# Altium PCB FlightController_Top_5x5.PcbDoc (part 3 of 4)
Units mm, origin at the board's own origin, x right, y up, seen from the top; angles counter-clockwise.
Board outline 127 x 127 mm, 2 copper layers (Top Layer, Bottom Layer), stack 0.691 mm thick; 156 components, 161 nets, 860 pads, 483 vias.
Unrouted connection lines stored in the file: 9.
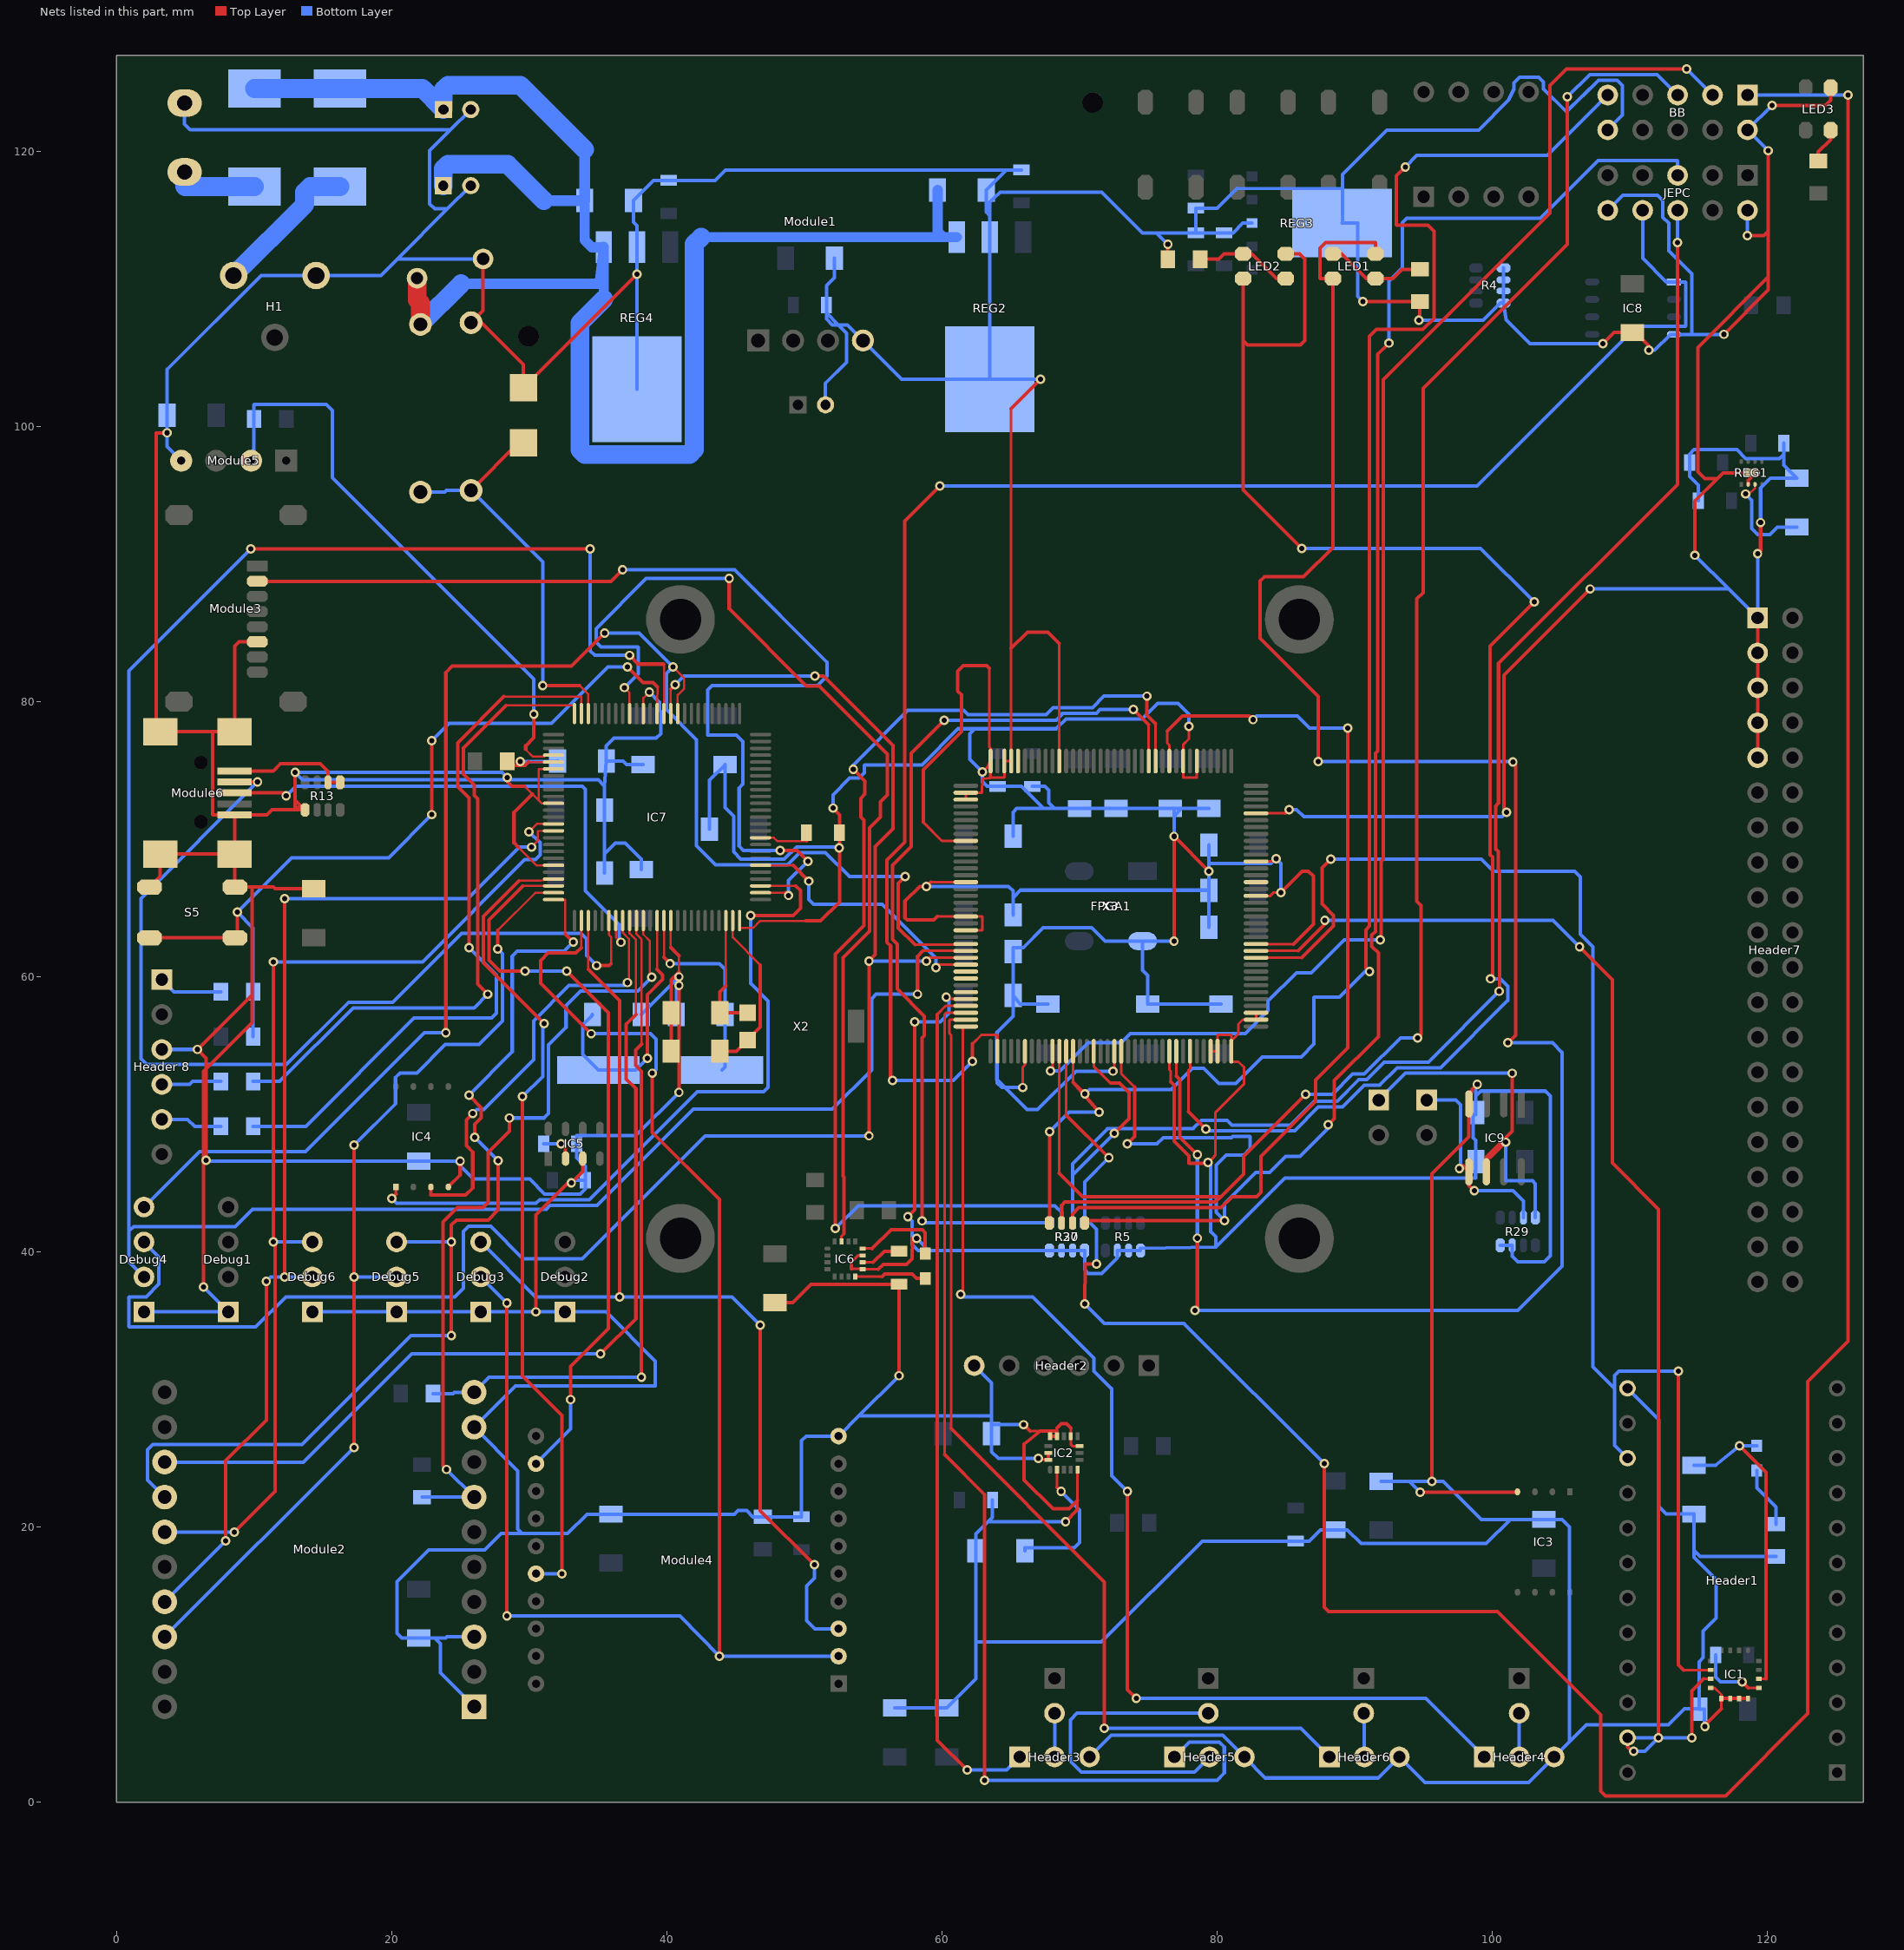
[diagram p3: the nets of this part, all layers, seen from the top]

## Via types
v1: diameter 0.686, hole 0.381, Top Layer to Bottom Layer, 483 vias

## Nets (pads, with @x,y where several pads share a name; then routed paths per layer and width w, separated by ;. In a path a pad name is that pad's centre, name@x,y a point inside that pad or via, vN(x,y) a via of type N, cw(c..) or ccw(c..) an arc to the next point about the centre after c; other vN are vias at no path point) (continued)
GND: "Header 8.3" BB.2 BB.10 C2.1 C3.2 C4.2 C5.1 C7.2 C8.2 C9.1 C10.2 C11.2 C12.2 C13.2 C14.2 C15.1 C16.2 C17.2 C18.2 C19.1 C20.2 C21.2 C23.1 C24.2 C25.2 C26.2 C27.2 C28.2 C29.2 C30.2 C31.2 C32.1 C33.1 C34.1 C35.1 C36.2 C37.2 C38.1 C39.2 C40.1 C41.2 C42.2 C43.2 C44.2 C45.2 C46.2 C47.2 C48.2 C49.1 C56.2 C57.2 C58.2 C59.2 C60.2 C61.2 C62.2 C63.2 C64.2 C65.2 C66.2 C67.2 C68.2 C69.2 C70.2 C71.2 C72.2 C73.2 C74.2 C75.2 C76.2 C77.2 C78.1 C79.1 D2.A Debug1.1 Debug2.1 Debug3.1 Debug4.1 Debug5.1 Debug6.1 FPGA1.6 FPGA1.19 FPGA1.27 FPGA1.33 FPGA1.34 FPGA1.36 FPGA1.38 FPGA1.39 FPGA1.49 FPGA1.56 FPGA1.61 FPGA1.68 FPGA1.78 FPGA1.80 FPGA1.98 FPGA1.105 FPGA1.106 FPGA1.108 FPGA1.110 FPGA1.111 FPGA1.117 FPGA1.123 FPGA1.128 FPGA1.130 FPGA1.140 H1.OUT Header1.13 Header2.6 Header3.3 Header4.3 Header5.3 Header6.3 Header7.1 Header7.3 Header7.5 Header7.7 Header7.9 Header9.R IC1.8 IC1.9 IC1.10 IC1.11 IC1.12 IC2.5 IC2.8 IC2.10 IC2.12 IC2.13 IC2.15 IC2.16 IC3.4 IC4.4 IC5.3 IC6.9 IC6.11 IC7.15 IC7.31 IC7.36 IC7.45 IC7.65 IC7.75 IC8.4 IC9.4 JEPC.2 JEPC.10 LED3.1 Module1.4 Module2.1 Module2.3 Module2.9 Module3.6 Module4.10 Module5.4 Module6.1 R3.2 R4.5 R4.6 R4.7 R4.8 R5.5 R5.6 R5.7 R6.2 R7.2 R13.5 R20.1 R29.3 R29.4 R30.5 R30.6 R30.7 R30.8 REG1.2 REG2.2 REG3.3 REG4.2 S5.1 X3.2 | length 1607.2
  Top Layer w0.158: 29.19,69.464 30.526,68.128 IC7.45@31.778,68.128 ; 29.677,73.859 30.228,73.307 30.704,72.831 ; IC7.36@31.778,72.628 30.907,72.628 30.704,72.831 ; IC7.31@31.778,75.128 30.729,75.128 30.704,75.103 30.704,72.831 ; IC7.15@38.303,79.153 38.303,80.276 v1(38.743,80.717) ; 40.303,62.137 40.303,62.232 ; IC7.65@40.303,64.103 40.303,62.232 ; 40.889,60.358 40.889,61.55 40.889,61.646 40.303,62.232 ; IC7.75@45.303,64.103 45.303,63.567 46.287,63.567 46.799,64.08 50.11,64.08
  Top Layer w0.189: 53.437,39.277 53.92,39.759 IC6.11@54.239,39.759 ; 53.462,38.781 54.174,38.781 54.174,38.759 IC6.9@54.239,38.759 55.393,38.759 ; 58.673,71.238 60.011,69.901 FPGA1.117@61.748,69.901 ; 59.192,66.901 FPGA1.123@61.748,66.901 ; 59.67,64.401 FPGA1.128@61.748,64.401 62.937,64.401 62.962,64.376 62.962,63.426 62.937,63.401 FPGA1.130@61.748,63.401 ; v1(60.32,58.542) 60.462,58.401 FPGA1.140@61.748,58.401 ; FPGA1.111@61.748,72.901 61.743,72.901 61.743,73.401 FPGA1.110@61.748,73.401 62.937,73.401 62.962,74.392 63.523,74.468 FPGA1.108@63.538,75.23 ; v1(62.962,74.913) 63.28,75.23 ; 63.445,82.457 63.445,76.729 63.548,76.625 FPGA1.108@63.548,75.701 ; FPGA1.106@64.548,75.701 FPGA1.106@64.548,75.687 ; 65.048,101.324 65.048,83.898 FPGA1.105@65.048,75.701 65.048,75.687 FPGA1.106@64.548,75.687 ; v1(65.888,51.964) 65.888,53.437 66.048,53.596 FPGA1.6@66.048,54.601 ; 66.416,26.996 67.161,26.986 67.88,26.977 68.375,26.97 ; v1@67.14,24.9 IC2.16@67.741,24.9 ; IC2.12@68.375,26.616 68.375,26.97 ; 68.375,27.212 68.375,26.996 68.375,26.97 ; FPGA1.98@68.548,75.701 68.548,84.248 ; 69.375,27.212 IC2.10@69.375,26.616 69.375,26.03 69.506,25.9 IC2.8@70.009,25.9 ; 69.875,21.285 69.875,21.957 IC2.5@69.875,24.184 ; v1(72.436,53.158) 72.548,53.269 FPGA1.19@72.548,54.601 ; FPGA1.27@76.548,54.601 76.548,53.234 76.653,53.129 76.653,52.396 ; v1(77.973,78.227) 77.973,77.313 77.548,76.888 FPGA1.80@77.548,75.701 77.548,74.519 77.573,74.494 78.523,74.494 78.548,74.519 FPGA1.78@78.548,75.701 ; v1@79.358,46.452 79.391,46.489 79.393,46.491 79.904,47.068 79.904,50.162 81.987,52.245 81.987,53.424 81.568,53.843 81.048,53.843 FPGA1.36@81.048,54.601 FPGA1.36@81.048,55.36 ; FPGA1.33@79.548,54.601 79.548,54.605 FPGA1.34@80.048,54.605 ; FPGA1.34@80.048,54.601 FPGA1.34@80.048,54.605 ; FPGA1.39@82.848,57.401 FPGA1.38@82.848,56.901 81.885,56.901 81.563,56.579 81.563,55.875 FPGA1.36@81.048,55.36 ; FPGA1.49@82.848,62.401 85.566,62.401 ; FPGA1.56@82.848,65.901 83.884,65.901 84.133,66.15 v1(84.654,66.15) ; FPGA1.61@82.848,68.401 84.098,68.401 v1(84.298,68.601) ; FPGA1.68@82.848,71.901 84.985,71.901 ; IC1.8@115.893,8.324 116.188,8.324 116.668,7.844 IC1.9@116.668,7.549 116.668,6.8 ; 63.28,75.23 FPGA1.108@63.538,75.23 ; 63.28,75.23 FPGA1.108@63.548,75.701 ; FPGA1.108@63.538,75.23 FPGA1.108@63.548,75.23 ; FPGA1.108@63.538,75.23 FPGA1.108@63.548,75.701 ; FPGA1.108@63.548,75.23 FPGA1.108@63.548,75.701 ; FPGA1.108@63.548,75.23 63.548,74.519 63.573,74.494 64.523,74.494 64.548,74.519 FPGA1.106@64.548,75.687 ; FPGA1.34@80.048,54.605 80.048,55.774 80.073,55.799 81.023,55.799 81.048,55.774 FPGA1.36@81.048,55.36
  Top Layer w0.252: IC4.4@24.13,44.737 24.13,44.75 24.989,45.609 ; v1(94.793,22.551) 101.854,22.551 IC3.4@101.854,22.573
  Top Layer w0.254: S5.1@2.413,66.548 3.189,67.324 Module6.1@3.189,68.935 Module6.1@8.589,68.935 ; Module6.1@3.189,77.835 Module6.1@3.385,77.835 ; v1(3.686,99.563) 3.661,99.538 2.891,99.538 2.891,78.329 Module6.1@3.385,77.835 ; v1(6.32,37.46) 6.32,53.132 6.523,53.335 ; v1(6.523,46.681) 6.523,53.335 ; Module3.6@10.239,84.369 8.914,84.369 8.589,84.044 Module6.1@8.589,77.835 7.031,77.835 ; v1(13,74.875) 13,72.863 ; C15.1@14.351,66.418 11.53,66.418 11.4,66.548 9.825,66.548 ; 24.989,45.609 v1(24.989,46.604) ; C38.1@26.657,112.206 26.657,108.449 R20.1@25.781,107.573 26.56,107.573 29.591,104.542 D2.A@29.591,102.838 v1(37.846,111.093) ; v1(28.418,74.494) 28.418,74.202 28.761,73.859 29.677,73.859 ; 29.19,69.464 28.901,69.754 28.901,71.979 30.228,73.307 ; v1(30.501,35.657) 30.501,42.706 v1@32.825,45.03 ; v1(33.066,45.03) 33.899,45.862 IC5.3@33.899,46.804 ; 40.303,62.137 40.889,61.55 ; C35.1@40.322,54.61 C34.1@40.322,57.404 40.322,59.79 40.889,60.358 v1(40.889,60.009) v1(40.889,59.392) 40.889,57.404 v1(40.889,51.614) ; C21.2@47.879,36.325 49.17,36.325 50.507,37.662 C20.2@56.891,37.662 ; 50.11,64.08 51.196,64.08 52.568,65.452 v1@52.568,69.408 ; v1(52.091,72.278) 52.568,71.801 C30.2@52.568,70.485 v1@52.568,69.408 ; v1(52.548,69.388) v1@52.568,69.408 ; 53.437,39.277 53.437,38.807 53.462,38.781 ; 55.393,38.759 55.745,39.111 57.438,39.111 57.857,39.531 57.882,40.991 v1(58.174,40.991) ; v1(56.891,31.015) C20.2@56.891,37.662 ; C20.2@56.896,37.662 C20.2@56.891,37.662 ; v1(57.539,42.579) 58.034,43.074 v1(58.034,56.739) ; 58.673,71.238 58.673,75.082 61.425,77.834 61.425,80.526 61.159,80.793 61.159,82.241 61.565,82.647 63.254,82.647 63.445,82.457 ; v1(58.885,66.594) 58.401,66.594 57.322,65.515 57.322,64.321 57.501,64.141 59.41,64.141 59.67,64.401 ; v1(58.885,66.594) 59.192,66.901 ; 65.048,83.898 66.224,85.074 67.722,85.074 68.548,84.248 ; 65.048,101.324 v1(67.178,103.454) ; v1(65.959,27.453) 66.416,26.996 ; v1(67.026,25.014) v1@67.14,24.9 ; IC2.16@67.741,24.9 IC2.15@67.741,25.4 ; IC2.13@67.875,26.616 IC2.12@68.375,26.616 ; 68.375,26.996 67.173,26.996 67.161,26.986 65.994,26.042 65.994,23.441 68.093,21.342 69.261,21.342 69.875,21.957 ; 68.375,27.212 68.693,27.529 69.058,27.529 69.375,27.212 ; v1(68.997,20.407) 69.875,21.285 ; R7.2@76.437,112.184 v1(76.437,113.266) ; 76.653,52.396 76.906,52.142 76.906,48.052 77.959,46.999 77.959,46.477 77.984,46.452 v1@79.358,46.452 ; v1(76.881,62.611) v1(76.881,70.226) v1(79.413,67.695) ; v1(79.358,46.522) v1@79.391,46.489 ; v1(84.654,66.15) 86.201,67.697 86.648,67.697 87.017,67.327 87.017,63.853 85.566,62.401 ; 84.985,71.901 v1(85.252,72.168) ; v1(90.607,109.104) R6.2@94.757,109.104 94.757,108.13 94.687,108.06 v1(94.687,107.742) ; v1(95.626,23.342) 95.626,45.69 98.321,48.384 IC9.4@98.321,50.775 98.573,51.837 v1(98.928,52.192) ; v1(101.062,71.966) 100.883,72.146 100.883,81.96 v1(107.133,88.21) ; v1(108.06,106.04) 108.873,106.853 C64.2@110.193,106.853 110.435,106.853 111.4,105.888 v1(111.4,105.571) ; v1(114.753,90.664) 114.753,94.61 116.378,96.236 ; v1(115.489,5.507) 115.489,5.622 116.668,6.8 ; IC1.9@116.668,7.549 IC1.10@117.318,7.549 IC1.11@117.968,7.549 IC1.12@118.618,7.549 ; v1(116.861,106.723) 120.087,109.948 120.087,110.892 ; v1(118.575,113.889) 119.769,113.889 120.087,114.207 ; REG1.2@118.622,95.822 118.622,96.109 118.872,96.359 REG1.2@118.872,96.647 116.789,96.647 116.378,96.236 ; Header7.9@119.311,75.946 Header7.7@119.311,78.486 Header7.5@119.311,81.026 Header7.3@119.311,83.566 Header7.1@119.311,86.106 ; v1(119.311,90.787) 119.528,91.004 v1(119.528,93.036) ; v1(120.087,120.07) 120.087,114.207 ; v1(120.357,123.363) 124.245,123.363 124.613,123.732 LED3.1@124.613,124.656 ; Module6.1@3.385,77.835 5.888,77.835 7.031,77.835 ; 6.523,53.335 9.851,56.663 9.851,58.699 ; 6.523,53.335 6.523,54.102 v1(5.888,54.737) 9.851,58.699 ; 7.031,77.835 7.006,77.81 7.006,71.81 7.031,71.785 Module6.1@8.589,71.785 ; Module6.1@8.589,68.935 Module6.1@8.589,71.785 ; Module6.1@8.589,68.935 8.589,67.736 8.613,67.712 S5.1@8.613,66.548 9.825,66.548 ; Module6.1@8.589,71.785 10.943,71.785 11.31,72.152 R13.5@13.711,72.152 ; 9.825,66.548 9.851,66.523 9.851,58.699 ; 13,72.863 13,72.36 13.026,72.335 R13.5@13.528,72.335 ; 13,72.863 R13.5@13.528,72.335 ; R13.5@13.528,72.335 13.711,72.335 R13.5@13.711,72.152 ; R13.5@13.528,72.335 R13.5@13.711,72.152 ; 116.378,96.236 115.464,96.236 114.956,96.744 114.956,105.761 120.087,110.892 ; 120.087,110.892 120.087,114.207
  Bottom Layer w0.254: Debug4.1@2.002,35.657 Debug1.1@8.123,35.657 v1(6.32,37.46) ; 3.302,54.737 v1(5.888,54.737) ; Module5.4@4.709,97.536 3.686,98.559 v1(3.686,99.563) C17.2@3.686,100.838 3.686,104.168 10.516,110.998 H1.OUT@14.516,110.998 19.223,110.998 20.431,112.206 ; Header9.R@4.953,123.531 4.953,122 5.368,121.585 24.287,121.585 ; v1(6.523,46.681) 6.592,46.612 C13.2@21.971,46.612 v1@24.652,46.612 ; Debug6.1@14.245,35.657 Debug5.1@20.366,35.657 Debug3.1@26.488,35.657 29.536,35.657 v1(30.501,35.657) Debug2.1@32.609,35.657 35.606,35.657 39.183,32.08 39.183,30.298 39.157,30.272 29.002,30.272 Module2.9@26.005,27.275 29.18,24.1 29.18,19.871 29.498,19.553 ; v1(24.989,46.604) 24.981,46.612 v1@24.652,46.612 ; C36.2@25.758,117.533 24.07,115.845 ; C37.2@25.765,123.063 24.287,121.585 ; Module2.1@26.005,6.955 23.541,9.419 23.541,11.547 23.148,11.941 ; Module2.3@26.005,12.035 24.016,12.035 23.922,11.941 23.148,11.941 ; C38.1@26.657,112.206 20.431,112.206 ; v1(28.418,74.494) 28.037,74.875 v1(13,74.875) 13.523,74.352 35.022,74.352 35.49,73.884 ; v1@32.825,45.03 33.028,45.117 v1@33.249,45.212 ; v1(33.066,45.03) v1@33.249,45.212 ; C25.2@35.49,67.564 35.49,68.958 ; REG4.2@37.846,102.738 v1(37.846,111.093) REG4.2@37.846,113.076 37.846,114.626 37.589,114.883 C49.1@37.589,116.459 39.043,117.913 C47.2@40.132,117.913 43.516,117.913 44.278,118.675 64.697,118.675 ; C32.1@38.157,57.277 v1(40.889,60.009) ; C27.2@38.16,67.815 38.16,68.568 37.005,69.723 36.255,69.723 35.49,68.958 ; C28.2@38.287,75.441 37.076,75.441 36.825,75.692 C31.2@35.617,75.692 ; v1(38.743,80.717) 39.467,79.993 39.467,79.396 39.569,79.294 39.569,77.694 39.238,77.364 36.165,77.364 35.617,76.816 C31.2@35.617,75.692 ; C33.1@40.703,57.277 40.703,59.205 v1(40.889,59.392) ; v1(40.889,51.614) 37.759,48.484 33.458,48.484 C16.2@33.458,47.879 33.458,46.858 34.093,46.223 C14.2@34.093,45.212 ; C29.2@43.116,70.739 43.116,74.301 C26.2@44.242,75.427 ; C10.2@51.546,101.6 51.546,103.159 53.081,104.694 53.081,106.813 52.483,107.412 ; v1(52.091,72.278) 52.091,73.249 53.31,74.468 54.007,74.468 54.375,74.837 54.375,75.383 54.401,75.408 58.557,75.408 61.198,78.05 62.403,78.05 ; C9.1@52.194,112.268 52.194,110.832 51.619,110.257 C11.2@51.619,108.839 C11.2@51.619,108.276 ; v1(52.548,69.388) 52.472,69.464 49.443,69.464 48.548,68.569 45.394,68.569 44.864,69.1 44.864,71.687 44.242,72.309 C26.2@44.242,75.427 ; C67.2@56.569,6.86 C68.2@60.38,6.86 62.487,8.967 62.487,11.654 ; v1(56.891,31.015) 53.964,28.088 ; v1(57.539,42.579) 57.857,42.261 57.857,40.547 58.276,40.127 59.038,40.127 ; v1(58.034,56.739) 59.889,56.739 60.524,57.374 60.524,58.339 v1(60.32,58.542) ; v1(58.174,40.991) 59.038,40.127 ; v1(58.885,66.594) 64.853,66.594 65.183,66.264 65.183,65.756 ; Header2.6@62.357,31.75 63.624,30.483 63.624,28.062 ; C3.2@63.684,21.971 63.684,20.725 63.366,20.407 ; C75.2@65.183,64.516 65.183,65.756 ; C63.2@65.183,70.231 65.183,71.979 65.453,72.249 67.389,72.249 ; C41.2@65.786,118.675 64.697,118.675 ; v1(65.888,51.964) 64.599,51.964 ; v1(65.959,27.453) C4.2@63.624,27.453 ; C69.2@66.583,73.857 67.483,73.857 67.769,73.571 67.769,72.66 68.18,72.249 ; v1(67.026,25.014) 64.105,25.014 63.624,25.495 C4.2@63.624,26.797 C4.2@63.624,27.453 ; v1(67.178,103.454) REG2.2@63.5,103.454 ; C58.2@67.726,58.036 65.693,58.036 C71.2@65.183,58.674 ; v1(68.997,20.407) 63.366,20.407 ; Header3.3@70.739,3.302 72.309,4.872 80.429,4.872 Header5.3@82,3.302 83.528,1.773 91.732,1.773 Header6.3@93.26,3.302 95.119,1.443 102.662,1.443 Header4.3@104.521,3.302 105.637,4.418 ; v1(72.436,53.158) 69.756,53.158 66.973,50.375 66.188,50.375 64.599,51.964 ; v1(76.437,113.266) 75.6,114.103 ; v1(76.881,62.611) X3.2@74.598,62.611 ; v1(76.881,70.226) C76.2@76.881,71.707 ; v1(77.973,78.227) 77.973,79.118 77.186,79.905 75.689,79.905 74.554,78.77 69.049,78.77 68.328,78.05 62.403,78.05 ; v1(79.358,46.522) 79.558,46.322 79.558,41.49 79.928,41.12 79.928,40.354 ; C61.2@79.41,72.266 77.999,72.266 ; 79.413,68.271 79.413,68.321 C62.2@79.413,69.596 ; C59.2@79.413,63.627 C60.2@79.413,66.294 C60.2@79.413,66.315 ; 79.413,68.321 79.413,68.271 ; C74.2@80.299,58.036 C70.2@74.965,58.036 74.965,60.117 74.598,60.484 X3.2@74.598,62.611 ; REG3.3@82.55,114.808 81.879,114.808 81.174,114.103 C45.2@80.518,114.103 C48.2@78.486,114.103 ; v1(84.654,66.15) 84.654,68.245 v1(84.298,68.601) 83.942,68.245 79.438,68.245 79.413,68.271 ; v1(85.252,72.168) 85.803,72.168 86.322,71.649 100.745,71.649 v1(101.062,71.966) ; REG3.3@89.105,114.808 REG3.3@89.124,114.808 ; v1(90.607,109.104) 90.242,109.469 90.242,114.808 REG3.3@89.124,114.808 ; C72.2@91.948,23.342 94.001,23.342 ; v1(94.687,107.742) 99.343,107.742 100.605,109.004 R4.8@100.837,109.004 ; v1(94.793,22.551) 94.001,23.342 ; v1(98.928,52.192) 98.832,52.096 98.832,51.342 ; R29.4@100.602,40.504 R29.3@101.477,40.504 101.477,39.7 101.888,39.289 103.793,39.289 104.237,39.734 104.237,51.342 103.869,51.71 99.2,51.71 98.832,51.342 ; R4.5@100.837,111.554 R4.6@100.837,110.679 R4.7@100.837,109.879 R4.8@100.837,109.004 ; v1(107.133,88.21) 117.207,88.21 ; v1(108.06,106.04) 102.764,106.04 101.037,107.768 R4.8@100.837,109.004 ; JEPC.10@108.415,115.74 109.511,116.835 112.048,116.835 112.416,116.467 112.416,115.235 112.848,114.803 112.848,112.797 114.524,111.12 114.524,106.748 114.499,106.723 ; BB.10@108.415,121.582 109.495,122.661 109.495,124.811 109.107,125.199 107.749,125.199 105.405,122.906 103.754,124.557 103.754,125.065 103.397,125.423 102.016,125.423 101.595,125.002 101.595,124.532 101.189,123.732 99.027,121.569 92.356,121.569 89.124,118.337 89.124,117.318 ; Header1.13@109.855,30.099 112.136,27.818 112.136,21.497 112.675,20.958 C7.2@114.681,20.958 114.681,18.322 ; v1(111.4,105.571) 111.823,105.571 112.975,106.723 IC8.4@113.233,106.723 114.499,106.723 ; v1(114.753,90.664) 117.207,88.21 ; C39.2@115.005,94.615 115.005,95.747 114.37,96.382 C42.2@114.37,97.409 114.37,98.014 114.7,98.344 117.801,98.344 118.448,97.697 120.898,97.697 121.215,98.014 ; v1(115.489,5.507) 115.438,5.558 115.438,6.787 C2.1@115.05,6.787 C2.1@115.05,6.803 ; v1(116.861,106.723) 114.499,106.723 ; v1(118.575,113.889) JEPC.2@118.575,115.74 ; v1(119.311,90.787) Header7.1@119.311,86.106 117.207,88.21 ; v1(119.528,93.036) 119.528,95.538 120.253,96.263 C40.1@122.174,96.263 121.215,97.222 121.215,98.014 ; v1(120.087,120.07) BB.2@118.575,121.582 v1(120.357,123.363) ; R3.2@120.65,17.875 115.123,17.875 114.681,18.322 ; C44.2@121.215,98.806 121.215,98.014 ; 20.431,112.206 24.07,115.845 ; 23.148,11.941 C12.2@21.971,11.941 20.74,11.941 20.392,12.289 20.392,16.048 22.703,18.36 26.767,18.36 27.961,19.553 29.498,19.553 ; 24.07,115.845 23.148,115.845 22.779,116.213 22.779,120.077 24.287,121.585 ; v1@24.652,46.612 25.953,45.311 30.053,45.311 31.133,44.23 33.723,44.23 34.093,44.599 C14.2@34.093,45.212 ; 29.498,19.553 32.811,19.553 34.209,20.952 C23.1@35.941,20.952 44.924,20.952 45.195,21.223 45.81,21.223 46.28,20.754 C19.1@46.99,20.754 48.382,20.754 48.386,20.758 C18.2@49.784,20.758 49.805,20.758 49.805,26.293 50.135,26.623 Module4.10@52.499,26.623 53.964,28.088 ; v1@33.249,45.212 C14.2@34.093,45.212 ; 35.49,68.958 C24.2@35.49,72.136 35.49,73.884 ; 35.49,73.884 C31.2@35.617,75.692 ; C26.2@44.242,75.427 44.242,75.441 C26.2@44.256,75.441 C26.2@44.242,75.427 ; C11.2@51.619,108.276 52.483,107.412 ; C11.2@51.619,108.276 51.619,107.833 52.04,107.412 52.483,107.412 ; 52.483,107.412 53.134,107.412 Module1.4@54.271,106.275 57.092,103.454 REG2.2@63.5,103.454 ; 53.964,28.088 63.599,28.088 63.624,28.062 ; 59.038,40.127 67.836,40.127 R30.8@67.836,40.123 R30.7@68.711,40.123 R30.6@69.511,40.123 R30.5@70.386,40.123 70.386,38.729 70.658,38.456 71.637,38.456 72.775,39.594 R5.7@72.775,40.123 R5.6@73.575,40.123 R5.5@74.45,40.123 74.45,40.267 79.928,40.354 ; 62.403,78.05 62.048,77.694 62.048,75.827 v1(62.962,74.913) 62.962,74.202 63.306,73.857 C77.2@64.043,73.857 65.781,73.857 67.389,72.249 ; 62.487,11.654 C5.1@62.487,18.288 62.487,19.528 63.366,20.407 ; 62.487,11.654 71.598,11.654 78.937,18.993 C73.2@85.725,18.993 86.711,18.993 87.533,19.815 C56.2@88.519,19.815 89.48,19.815 90.478,18.817 99.576,18.817 101.33,20.571 ; REG2.2@63.5,103.454 REG2.2@63.5,113.792 63.5,115.362 ; 63.5,115.362 63.5,116.332 63.816,116.648 64.232,117.064 71.634,117.064 74.595,114.103 75.6,114.103 ; 63.5,115.362 63.243,115.619 C43.2@63.243,117.221 64.697,118.675 ; C4.2@63.624,27.453 63.624,28.062 ; 64.029,52.534 64.005,52.557 64.005,55.967 64.029,55.991 ; 64.029,52.534 64.599,51.964 ; 64.029,52.534 64.029,55.991 ; 64.029,52.534 64.029,52.294 64.359,51.964 64.599,51.964 ; 64.029,55.991 65.183,57.145 C71.2@65.183,58.674 ; C71.2@65.183,58.674 C65.2@65.183,61.849 65.183,62.149 65.934,62.149 67.382,63.597 70.887,63.597 71.873,62.611 X3.2@74.598,62.611 ; 65.183,65.756 65.742,66.315 C60.2@79.413,66.315 ; 67.389,72.249 68.18,72.249 ; 68.18,72.249 C66.2@70.012,72.249 71.319,72.249 71.336,72.266 C57.2@72.679,72.266 74.965,72.266 C76.2@76.616,72.266 C76.2@76.881,72.266 ; 75.6,114.103 C48.2@78.486,114.103 ; C76.2@76.881,71.707 C76.2@77.44,72.266 ; C76.2@76.881,71.707 C76.2@76.881,72.266 ; C76.2@76.881,72.266 C76.2@77.44,72.266 ; C76.2@77.44,72.266 77.999,72.266 ; C76.2@77.44,72.266 77.999,72.266 ; C48.2@78.486,114.103 C46.2@78.486,115.894 80.029,115.894 81.479,117.343 89.113,117.318 89.124,117.318 ; C60.2@79.413,66.315 v1(79.413,67.695) 79.413,68.271 ; 79.928,40.354 84.955,45.382 98.803,45.382 C78.1@98.832,46.584 98.832,48.123 98.624,48.331 98.624,49.99 98.832,49.99 C79.1@98.832,50.14 98.832,51.342 ; REG3.3@89.124,114.808 89.124,117.318 ; 94.001,23.342 v1(95.626,23.342) 96.465,23.342 99.236,20.571 101.33,20.571 ; 101.33,20.571 C8.2@103.759,20.571 105.086,20.571 105.637,20.02 105.637,4.418 ; 105.637,4.418 106.853,5.634 112.822,5.634 113.991,6.803 C2.1@115.05,6.803 ; 114.681,18.322 114.681,17.814 116.304,16.191 116.304,13.394 115.351,12.441 115.351,10.518 115.05,10.217 C2.1@115.05,6.803
  other v1: 58.885,66.594
GPS_PPS: IC7.59 Module2.13 | length 68.3
  Top Layer w0.158: IC7.59@37.303,64.103 37.303,63.167 37.78,62.69 37.78,57.287
  Top Layer w0.254: v1(35.2,32.609) 37.765,35.174 37.765,51.879 37.06,52.584 37.06,56.567 37.78,57.287
  Bottom Layer w0.254: Module2.13@3.505,24.735 13.584,24.735 21.458,32.609 v1(35.2,32.609)
GPS_RXA: Debug6.3 IC7.39 Module2.15 | length 77.3
  Top Layer w0.158: v1(29.999,70.563) 30.564,71.128 IC7.39@31.778,71.128
  Top Layer w0.254: v1(8.581,19.655) 11.527,22.601 11.527,40.61 v1(11.4,40.737) v1(11.4,61.108)
  Bottom Layer w0.254: Module2.15@3.505,19.655 v1(8.581,19.655) ; v1(11.4,40.737) Debug6.3@14.245,40.737 ; v1(11.4,61.108) 22.271,61.108 29.688,68.525 30.45,68.525 30.806,68.88 30.806,69.757 v1(29.999,70.563)
GPS_RXB: Debug5.3 IC7.50 Module2.14 | length 75.4
  Top Layer w0.158: IC7.50@31.778,65.628 32.609,65.628 32.634,63.127
  Top Layer w0.254: v1(24.354,33.93) v1(24.354,40.737) 24.354,41.982 24.71,42.337 27.021,42.337 27.758,43.074 v1(27.758,46.655) ; v1(25.624,51.405) 26.527,50.502 26.527,49.756 26.056,49.284 v1(26.056,48.357) ; 32.634,63.127 v1(33.219,62.543)
  Bottom Layer w0.254: Module2.14@3.505,22.195 2.256,23.444 2.256,25.624 2.637,26.005 13.483,26.005 21.408,33.93 v1(24.354,33.93) ; Debug5.3@20.366,40.737 v1(24.354,40.737) ; v1(25.624,51.405) 28.774,54.555 28.774,61.502 29.142,61.87 32.546,61.87 v1(33.219,62.543) ; v1(26.056,48.357) v1(27.758,46.655)
GPS_TXA: Debug6.2 IC7.40 Module2.17 | length 79.3
  Top Layer w0.158: v1(30.171,69.439) 30.628,69.896 30.628,70.603 IC7.40@31.778,70.628
  Top Layer w0.254: v1(7.946,19.016) 7.946,24.837 10.892,27.783 v1(10.892,37.88) ; v1(12.238,38.197) v1(12.238,65.705)
  Bottom Layer w0.254: Module2.17@3.505,14.575 v1(7.946,19.016) ; v1(10.892,37.88) 11.21,38.197 v1(12.238,38.197) Debug6.2@14.245,38.197 ; v1(12.238,65.705) 25.546,65.705 29.28,69.439 v1(30.171,69.439)
GPS_TXB: Debug5.2 IC7.49 Module2.18 | length 72.1
  Top Layer w0.158: 27.707,63.385 30.45,66.128 IC7.49@31.778,66.128
  Top Layer w0.254: v1(17.267,25.797) v1(17.267,38.197) v1(17.267,47.773) ; v1(27.707,62.048) 27.707,63.385
  Bottom Layer w0.254: Module2.18@3.505,12.035 v1(17.267,25.797) ; v1(17.267,38.197) Debug5.2@20.366,38.197 ; v1(17.267,47.773) 20.288,50.794 20.288,52.713 20.608,53.032 21.841,53.032 23.897,55.088 26.361,55.088 28.062,56.79 28.062,61.692 v1(27.707,62.048)
GPS_XRST: IC7.61 Module2.7 R8.2 | length 58.2
  Top Layer w0.158: IC7.61@38.303,64.103 38.303,63.097 38.781,62.619 v1@38.781,60.143
  Top Layer w0.254: v1(23.998,24.202) 23.73,24.47 23.73,42.183 24.773,43.226 26.64,43.226 27.021,43.607 27.021,47.255 28.57,48.805 v1(28.57,49.754) ; v1@38.781,60.143 v1(38.927,59.997)
  Bottom Layer w0.254: R8.2@22.225,22.193 23.971,22.193 23.973,22.195 Module2.7@26.005,22.195 v1(23.998,24.202) ; v1(28.57,49.754) 31.085,49.754 31.403,50.072 31.403,55.061 32.685,56.344 32.685,57.907 33.748,58.97 37.901,58.97 v1(38.927,59.997)
GPS_XSTBY: IC7.60 Module2.10 R9.2 | length 49.4
  Top Layer w0.158: IC7.60@37.803,64.103 37.803,63.113 38.188,62.729 38.188,55.129
  Top Layer w0.254: v1(38.173,30.907) 38.173,53.157 37.753,53.578 37.753,54.694 38.188,55.129
  Bottom Layer w0.254: R9.2@23.019,29.718 24.456,29.718 24.553,29.815 Module2.10@26.005,29.815 27.097,30.907 v1(38.173,30.907)
GYRO_DRDY: FPGA1.47 Header1.15 IC1.6 | length 104
  Top Layer w0.189: FPGA1.47@82.848,61.401 86.173,61.401 ; 113.922,9.624 IC1.6@115.893,9.624
  Top Layer w0.254: 86.173,61.401 88.478,63.706 88.478,64.484 87.651,65.312 87.651,67.94 v1(88.286,68.575) ; v1(113.543,31.339) 113.543,10.003 113.922,9.624
  Bottom Layer w0.254: v1(88.286,68.575) 99.233,68.575 100.122,67.686 106.015,67.686 106.421,67.28 106.421,63.114 107.325,62.211 107.325,31.669 108.911,30.083 ; Header1.15@109.855,25.019 108.911,25.963 108.911,30.083 ; v1(113.543,31.339) 109.228,31.339 108.911,31.022 108.911,30.083
GYRO_INT1: FPGA1.48 Header1.23 IC1.7 | length 98.6
  Top Layer w0.189: FPGA1.48@82.848,61.901 85.907,61.901 ; 115.388,8.974 IC1.7@115.893,8.974
  Top Layer w0.254: 85.907,61.901 87.854,63.848 v1(87.854,64.13) ; v1(106.371,62.2) 108.758,59.812 108.758,46.477 112.111,43.125 v1(112.111,4.694) ; Header1.23@109.855,4.699 109.855,4.034 110.185,3.704 v1(110.308,3.704) ; v1(114.525,4.699) 114.525,8.111 115.388,8.974
  Bottom Layer w0.254: v1(87.854,64.13) 104.44,64.13 v1(106.371,62.2) ; Header1.23@109.855,4.699 v1(114.525,4.699) ; v1(110.308,3.704) 111.12,3.704 v1(112.111,4.694)
HUMIDITY_I/O: IC7.29 Module5.2 R10.1 | length 43.3
  Top Layer w0.158: 29.752,76.537 30.247,76.043 31.11,76.043 31.11,76.128 IC7.29@31.778,76.128
  Top Layer w0.254: 29.752,76.537 29.752,76.819 30.348,77.415 v1(30.348,79.116)
  Bottom Layer w0.254: Module5.2@9.789,97.536 9.789,98.14 10.001,98.352 R10.1@10.001,100.584 10.001,101.595 10.026,101.621 15.261,101.621 15.693,101.189 15.693,96.312 30.348,81.656 v1(30.348,79.116)
IC9_10K_C: IC9.5 J5.1 R29.7 | length 14.9
  Top Layer w0.254: v1(97.633,46.071) 97.864,46.302 IC9.5@98.321,45.845 98.321,44.852 v1(98.713,44.46)
  Bottom Layer w0.254: J5.1@95.25,51.054 97.362,51.054 97.709,50.707 97.709,46.147 v1(97.633,46.071) ; v1(98.713,44.46) 101.543,44.46 102.277,43.726 R29.7@102.277,42.504
IC9_10K_D: IC9.6 J6.1 R29.8 | length 27.8
  Top Layer w0.254: IC9.6@99.591,45.845 99.591,46.884 ; v1(100.986,47.989) 99.906,46.909 99.616,46.909 99.591,46.884 ; v1(101.468,53.004) 101.468,48.781 99.591,46.903 99.591,46.884
  Bottom Layer w0.254: J6.1@91.767,51.054 93.717,53.004 v1(101.468,53.004) ; v1(100.986,47.989) 100.986,45.207 101.011,45.182 102.942,45.182 103.152,44.972 R29.8@103.152,42.504
ICSP_MCLR: "Header 8.1" R18.2 | length 4.7
  Bottom Layer w0.254: 3.302,59.817 4.191,58.928 R18.2@7.588,58.928
ICSP_PGC: IC7.24 R15.2 | length 53.5
  Top Layer w0.158: 28.156,80.386 33.778,80.386 IC7.24@33.803,79.153
  Top Layer w0.254: v1(25.643,62.143) 25.643,73.011 24.803,73.851 24.803,77.034 28.156,80.386
  Bottom Layer w0.254: R15.2@9.938,49.149 13.769,49.149 21.64,57.02 27.277,57.02 27.631,57.374 27.631,60.155 v1(25.643,62.143)
ICSP_PGD: IC7.25 R14.2 | length 48.3
  Top Layer w0.158: 28.314,79.74 33.303,79.74 IC7.25@33.303,79.153
  Top Layer w0.254: v1(26.996,58.746) 26.267,59.474 26.267,72.951 26.008,73.21 26.008,73.95 25.211,74.747 25.211,76.637 28.314,79.74
  Bottom Layer w0.254: R14.2@9.938,52.409 11.865,52.409 17.205,57.749 25.999,57.749 v1(26.996,58.746)
MAGNET_DRDY: IC6.15 IC7.17 | length 75.7
  Top Layer w0.158: v1(36.927,81.044) 37.303,80.668 IC7.17@37.303,79.153
  Top Layer w0.189: IC6.15@52.714,40.784 52.714,41.157 52.904,41.347
  Top Layer w0.254: v1(44.547,88.972) 44.547,86.765 50.146,81.166 51.082,81.166 56.045,76.204 56.045,73.249 55.541,72.746 55.541,71.619 54.754,70.832 54.754,63.343 52.827,61.416 52.827,45.538 52.904,45.461 52.904,41.347
  Bottom Layer w0.254: v1(36.927,81.044) 37.932,82.048 37.932,83.968 37.892,84.008 35.213,84.008 34.868,84.352 34.868,85.327 38.513,88.972 v1(44.547,88.972)
MCLR: IC7.13 R17.1 R18.1 S5.2 | length 61.4
  Top Layer w0.158: IC7.13@39.303,79.153 39.303,79.943 39.34,81.085
  Top Layer w0.254: S5.2@2.413,62.848 S5.2@8.613,62.848 8.784,62.848 v1(8.784,64.715) ; v1(22.932,71.805) v1(22.932,77.186) ; v1(37.156,82.545) 38.299,81.402 39.023,81.402 39.34,81.085
  Bottom Layer w0.254: R17.1@9.938,55.668 R18.1@9.938,58.928 9.938,63.56 v1(8.784,64.715) 12.746,68.677 19.804,68.677 v1(22.932,71.805) ; v1(22.932,77.186) 24.181,78.435 31.623,78.435 35.733,82.545 v1(37.156,82.545)
MOTOR_W1: FPGA1.141 Header3.1 | length 62.3
  Top Layer w0.189: 59.686,57.292 60.295,57.901 FPGA1.141@61.748,57.901
  Top Layer w0.254: 59.686,57.292 59.686,4.516 v1(61.844,2.358)
  Bottom Layer w0.254: v1(61.844,2.358) 64.715,2.358 Header3.1@65.659,3.302
MOTOR_W2: FPGA1.142 Header5.1 | length 82.3
  Top Layer w0.189: 60.21,25.277 60.21,57.315 60.297,57.401 FPGA1.142@61.748,57.401
  Top Layer w0.254: 60.21,25.277 63.114,22.373 v1(63.114,1.596)
  Bottom Layer w0.254: v1(63.114,1.596) 80.005,1.596 80.539,2.129 80.539,4.034 80.183,4.39 78.007,4.39 Header5.1@76.92,3.302
MOTOR_W3: FPGA1.143 Header6.1 | length 74.6
  Top Layer w0.189: 60.676,27.173 60.676,55.774 60.553,55.896 60.553,56.866 60.588,56.901 FPGA1.143@61.748,56.901
  Top Layer w0.254: 60.676,27.173 71.827,16.023 v1(71.827,5.38)
  Bottom Layer w0.254: v1(71.827,5.38) 86.102,5.38 Header6.1@88.18,3.302
MOTOR_W4: FPGA1.144 Header4.1 | length 84.4
  Top Layer w0.189: v1@61.54,37.079 61.54,56.401 FPGA1.144@61.748,56.401
  Top Layer w0.254: v1(61.387,36.927) v1@61.54,37.079 ; v1(73.503,22.601) 73.503,8.2 v1(74.138,7.565)
  Bottom Layer w0.254: v1(61.387,36.927) 61.565,36.749 66.607,36.749 71.065,32.292 71.065,31.35 72.346,30.069 72.346,23.759 v1(73.503,22.601) ; v1(74.138,7.565) 95.178,7.565 Header4.1@99.441,3.302
MSEL0: FPGA1.85 R30.1 | length 66.6
  Top Layer w0.189: FPGA1.85@75.048,75.701 75.048,78.333
  Top Layer w0.254: v1(58.568,42.274) 58.568,55.58 58.735,55.747 58.735,57.156 56.764,59.127 56.764,62.397 56.437,62.725 56.437,68.122 57.786,69.471 57.786,76.261 v1(60.181,78.656) ; v1(73.935,79.447) 75.048,78.333
  Bottom Layer w0.254: v1(58.568,42.274) 58.719,42.123 R30.1@67.836,42.123 ; v1(60.181,78.656) 68.324,78.656 68.76,79.092 68.76,79.178 71.239,79.178 71.507,79.447 v1(73.935,79.447)
MSEL1: FPGA1.84 R30.2 | length 81.9
  Top Layer w0.189: FPGA1.84@75.548,75.701 75.548,78.427
  Top Layer w0.254: v1(52.269,41.728) 52.269,61.673 54.346,63.751 54.346,71.406 54.121,71.631 54.121,72.997 54.413,73.289 54.413,74.26 v1(53.569,75.105) ; v1(74.922,80.418) 74.922,79.053 75.548,78.427
  Bottom Layer w0.254: v1(52.269,41.728) 53.92,43.379 68.233,43.379 68.711,42.901 R30.2@68.711,42.123 ; v1(53.569,75.105) 53.569,75.424 57.522,79.377 61.593,79.377 61.906,79.064 67.582,79.064 68.104,79.586 70.954,79.586 71.785,80.418 v1(74.922,80.418)
NCE: FPGA1.16 JEPC.6 R30.3 | length 115.3
  Top Layer w0.189: FPGA1.16@71.048,54.601 71.048,53.515 72.281,52.282
  Top Layer w0.254: 72.281,52.282 72.921,52.282 73.605,51.599 73.605,49.703 v1(72.538,48.636) ; v1(100.529,58.966) 100.568,59.006 100.568,67.733 100.449,67.852 100.449,69.128 100.273,69.304 100.273,72.425 100.475,72.627 100.475,82.8 113.483,95.808 v1(113.483,113.406)
  Bottom Layer w0.254: R30.3@69.511,42.123 69.511,45.609 ; v1(72.538,48.636) 69.511,45.609 ; v1(100.529,58.966) 95.384,53.821 92.177,53.821 90.895,52.539 90.318,52.539 88.741,50.963 87.077,50.963 85.353,49.238 81.091,49.238 80.751,49.578 78.875,49.578 78.267,48.97 72.054,48.97 69.511,46.427 69.511,45.609 ; v1(113.483,113.406) 113.495,113.419 JEPC.6@113.495,115.74
NCONFIG: FPGA1.20 JEPC.5 R27.1 | length 137.5
  Top Layer w0.189: FPGA1.20@73.048,54.601 73.048,52.979 74.013,52.015
  Top Layer w0.254: R27.1@70.386,42.123 70.386,42.286 v1(80.552,42.286) v1(80.564,42.286) ; v1(73.478,47.874) 74.013,48.409 74.013,52.015 ; v1(88.097,49.273) 88.54,49.716 88.54,52.48 91.74,55.681 91.74,61.743 91.256,62.227 91.256,63.051 91.521,63.316 91.521,76.252 91.683,76.415 91.683,105.272 v1(92.502,106.091)
  Bottom Layer w0.254: v1(73.478,47.874) 75.649,47.874 76.105,48.33 81.056,48.33 81.148,48.422 82.393,48.422 82.429,48.386 82.429,47.532 81.959,47.062 80.681,47.062 79.966,46.346 79.966,42.885 v1@80.552,42.299 ; v1(80.552,42.286) v1@80.552,42.299 ; v1(80.564,42.286) v1@80.552,42.299 ; v1(88.097,49.273) 88.097,48.998 86.046,46.947 84.989,46.947 83.839,45.797 82.828,45.797 80.552,43.521 v1@80.552,42.299 ; v1(92.502,106.091) 92.502,110.587 93.478,111.563 93.478,114.842 93.795,115.159 103.528,115.159 107.726,119.357 113.463,119.357 113.495,119.325 JEPC.5@113.495,118.28
NCSO: FPGA1.2 IC8.1 JEPC.8 | length 125.5
  Top Layer w0.189: 62.238,55.152 62.886,55.799 64.023,55.799 64.048,55.774 FPGA1.2@64.048,54.601
  Top Layer w0.254: v1(56.434,52.472) 56.282,52.624 56.282,62.251 56.004,62.529 56.004,68.499 57.299,69.795 57.299,93.139 v1(59.863,95.703) ; v1(62.238,53.882) 62.238,55.152
  Bottom Layer w0.254: v1(56.434,52.472) 60.828,52.472 v1(62.238,53.882) ; v1(59.863,95.703) 98.928,95.703 110.536,107.31 114.067,107.31 114.092,107.336 114.092,110.507 114.067,110.533 IC8.1@113.233,110.533 112.683,110.533 110.955,112.26 JEPC.8@110.955,115.74
NetC1_2: C1.2 IC1.13 | length 5.1
  Top Layer w0.189: 118.616,8.324 IC1.13@119.393,8.324
  Top Layer w0.254: v1(118.182,8.758) 118.616,8.324
  Bottom Layer w0.254: C1.2@116.26,10.724 116.26,9.114 116.616,8.758 v1(118.182,8.758)
NetC5_2: C5.2 IC2.2 | length 10.4
  Top Layer w0.189: 68.375,22.903 IC2.2@68.375,24.184
  Top Layer w0.254: 68.375,22.903 v1(68.677,22.601)
  Bottom Layer w0.254: C5.2@66.037,18.288 66.037,18.512 69.655,18.512 70.03,18.887 70.03,21.248 v1(68.677,22.601)
NetC6_1: C6.1 C7.1 IC1.14 | length 23.3
  Top Layer w0.189: IC1.14@119.393,8.974 119.909,8.974
  Top Layer w0.254: v1(118.004,25.919) 119.934,23.989 119.934,8.999 119.909,8.974
  Bottom Layer w0.254: C7.1@114.681,24.508 116.251,24.508 v1(118.004,25.919) C6.1@119.253,25.919
NetC6_2: C6.2 R3.1 | length 4.5
  Bottom Layer w0.254: C6.2@119.253,24.119 119.253,22.855 120.65,21.458 R3.1@120.65,20.225
NetC16_1: C16.1 IC5.2 | length 2.5
  Top Layer w0.254: v1(32.33,47.874) 32.649,47.555 IC5.2@32.649,46.804
  Bottom Layer w0.254: C16.1@31.058,47.879 31.058,47.874 v1(32.33,47.874)
NetC20_1: C20.1 IC6.10 | length 3
  Top Layer w0.189: IC6.10@54.239,39.259 55.006,39.259
  Top Layer w0.254: 55.006,39.259 55.809,40.062 C20.1@56.896,40.062
NetC22_1: C22.1 IC6.12 | length 6.7
  Top Layer w0.189: IC6.12@54.239,40.259 54.946,40.259
  Top Layer w0.254: 54.946,40.259 56.316,41.629 58.585,41.629 58.801,41.413 C22.1@58.801,39.889
NetC22_2: C22.2 IC6.8 | length 5.3
  Top Layer w0.189: IC6.8@53.714,38.234 55.671,38.234
  Top Layer w0.254: 55.671,38.234 55.85,38.413 57.837,38.413 58.161,38.089 C22.2@58.801,38.089
NetC30_1: C30.1 IC7.85 | length 4
  Top Layer w0.158: IC7.85@46.828,70.128 47.798,70.128 48.043,69.884 50.168,69.884
  Top Layer w0.254: 50.168,69.884 C30.1@50.168,70.485
NetC31_1: C31.1 IC7.30 R16.1 | length 7.6
  Top Layer w0.158: 29.96,75.628 IC7.30@31.778,75.628
  Top Layer w0.254: R16.1@28.413,75.692 R16.1@28.413,75.383 ; v1(29.358,75.662) 29.078,75.383 R16.1@28.413,75.383 ; 29.96,75.628 29.704,75.372 28.413,75.372 R16.1@28.413,75.383
  Bottom Layer w0.254: v1(29.358,75.662) 32.067,75.662 C31.1@32.067,75.692
NetC40_2: C40.2 REG1.3 | length 7.5
  Top Layer w0.158: v1@118.69,95.118 119.122,95.551 REG1.3@119.122,95.822
  Top Layer w0.254: v1(118.436,95.118) v1@118.69,95.118
  Bottom Layer w0.254: v1(118.436,95.118) 118.893,94.661 118.893,92.617 119.337,92.172 120.214,92.172 120.755,92.713 C40.2@122.174,92.713
NetD1_0: D1.A Header9.L | length 6.1
  Bottom Layer w1.37: Header9.L@4.953,118.531 4.953,117.496 4.986,117.463 D1.A@10.033,117.463
NetD3_0: D3.A H1.IN | length 10.9
  Bottom Layer w1.37: H1.IN@8.516,110.998 13.686,116.168 13.686,117.064 14.085,117.463 D3.A@16.256,117.463
NetHeader3_2: Header3.2 J1.2 | length 3.2
  Bottom Layer w0.254: Header3.2@68.199,3.302 68.22,3.323 68.22,6.456 J1.2@68.199,6.477
NetHeader4_2: Header4.2 J3.2 | length 3.2
  Bottom Layer w0.254: Header4.2@101.981,3.302 J3.2@101.981,6.477
NetHeader5_2: Header5.2 J2.2 | length 24.1
  Bottom Layer w0.254: J2.2@79.375,6.477 69.82,6.477 69.342,5.999 69.342,3.001 70.138,2.205 78.363,2.205 Header5.2@79.46,3.302
NetHeader6_2: Header6.2 J4.2 | length 3.2
  Bottom Layer w0.254: J4.2@90.678,6.477 90.724,6.431 90.724,4.11 90.72,4.106 Header6.2@90.72,3.302
"NetHeader 8_4": "Header 8.4" R14.1 | length 4.4
  Bottom Layer w0.254: 3.302,52.197 5.329,52.197 5.541,52.409 R14.1@7.588,52.409
"NetHeader 8_5": "Header 8.5" R15.1 | length 4.5
  Bottom Layer w0.254: 3.302,49.657 5.177,49.657 5.685,49.149 R15.1@7.588,49.149
NetLED1_2: LED1.1 LED1.4 R6.1 | length 7.4
  Top Layer w0.254: LED1.1@88.428,112.576 89.073,112.576 90.873,110.776 LED1.4@91.528,110.776 92.782,110.776 93.46,111.454 R6.1@94.757,111.454
NetLED2_2: LED2.1 LED2.4 R7.1 | length 7.1
  Top Layer w0.254: R7.1@78.787,112.184 80.132,112.184 80.524,112.576 LED2.1@81.911,112.576 82.545,112.576 84.345,110.776 LED2.4@85.011,110.776
NetLED3_1: LED3.2 R21.1 | length 2.6
  Top Layer w0.254: R21.1@123.713,119.328 123.713,119.985 124.613,120.885 LED3.2@124.613,121.556
NetModule6_4: Module6.5 R13.1 R13.2 | length 8.9
  Top Layer w0.254: Module6.5@8.589,74.985 11.393,74.985 11.929,75.52 14.816,75.52 15.386,74.951 R13.2@15.386,74.152 R13.1@16.261,74.152
NSTATUS: FPGA1.82 R27.2 | length 67.8
  Top Layer w0.189: 76.394,77.885 76.394,77.013 76.548,76.859 FPGA1.82@76.548,75.701
  Top Layer w0.254: R27.2@69.511,42.123 69.511,42.769 69.969,43.228 80.312,43.228 81.118,44.034 82.881,44.034 83.204,44.357 83.204,46.97 87.19,50.957 87.19,52.527 89.518,54.854 v1(89.518,78.1) ; 76.394,77.885 77.484,78.975 82.362,78.975 v1(82.625,78.712)
  Bottom Layer w0.254: v1(82.625,78.712) 82.897,78.985 85.856,78.985 86.74,78.1 v1(89.518,78.1)
OSC1: C32.2 IC7.63 X1.2 | length 19.4
  Top Layer w0.158: 39.303,60.551 IC7.63@39.303,64.103
  Top Layer w0.254: v1(38.596,54.099) 38.596,58.712 39.71,59.826 39.71,60.144 39.303,60.551
  Bottom Layer w0.254: C32.2@34.607,57.277 34.607,57.225 33.89,56.508 33.89,54.38 X1.2@35.027,53.243 37.74,53.243 v1(38.596,54.099)
OSC2: C33.2 IC7.64 X1.1 | length 14.9
  Top Layer w0.158: 39.803,61.432 IC7.64@39.803,64.103
  Top Layer w0.254: 39.803,61.432 v1(40.254,60.981)
  Bottom Layer w0.254: v1(40.254,60.981) 43.821,60.981 44.253,60.549 C33.2@44.253,57.277 44.253,53.469 X1.1@44.027,53.243
P28: FPGA1.28 LED1.2 LED1.3 | length 151.1
  Top Layer w0.189: 77.048,52.796 FPGA1.28@77.048,54.601
  Top Layer w0.254: 77.048,52.796 77.314,52.53 77.314,48.356 v1(78.583,47.087) ; v1(78.405,35.759) 78.583,35.936 v1(78.583,41.016) ; v1(87.371,75.662) 87.371,80.412 83.155,84.628 83.155,88.781 83.473,89.099 86.294,89.099 88.428,91.232 LED1.3@88.428,110.776 87.524,110.776 87.498,110.801 87.498,112.987 87.918,113.406 91.502,113.406 91.528,113.381 LED1.2@91.528,112.576 ; v1(101.164,55.215) 101.711,55.763 101.711,75.444 v1(101.519,75.637)
  Bottom Layer w0.254: v1(78.405,35.759) 101.875,35.759 105.101,38.984 105.101,54.517 104.402,55.215 v1(101.164,55.215) ; v1(78.583,41.016) v1(78.583,47.087) ; v1(87.371,75.662) 101.494,75.662 v1(101.519,75.637)
P30: FPGA1.30 LED2.2 LED2.3 | length 115.6
  Top Layer w0.189: 77.948,50.199 77.948,53.234 78.048,53.334 FPGA1.30@78.048,54.601
  Top Layer w0.254: 77.948,50.199 v1(79.193,48.954) ; LED2.3@81.911,110.776 81.911,106.269 ; LED2.2@85.011,112.576 86.013,112.576 86.381,112.207 86.381,106.269 86.063,105.952 82.228,105.952 81.911,106.269 ; v1(86.178,91.158) 81.911,95.424 81.911,106.269 ; v1(99.894,59.876) 100.041,60.023 100.041,68.72 99.865,68.896 99.865,84.066 v1(103.069,87.27)
  Bottom Layer w0.254: v1(79.193,48.954) 79.316,48.83 85.655,48.83 87.379,50.555 89.148,50.555 90.724,52.131 91.831,52.131 93.112,53.412 96.261,53.412 101.153,58.303 101.153,59.341 100.618,59.876 v1(99.894,59.876) ; v1(86.178,91.158) 99.181,91.158 v1(103.069,87.27)
P58: FPGA1.58
P104: FPGA1.104
P132: Debug4.4 FPGA1.132 IC7.10 | length 116.4
  Top Layer w0.158: v1(40.457,82.545) 41.27,81.732 41.27,80.969 40.803,80.502 IC7.10@40.803,79.153
  Top Layer w0.189: 58.052,62.345 60.93,62.345 60.93,62.401 FPGA1.132@61.748,62.401
  Top Layer w0.254: v1(23.948,55.952) 23.948,82.139 24.418,82.609 33.092,82.609 v1(35.492,85.009) ; v1(57.336,67.305) 56.845,66.814 56.845,63.553 58.052,62.345
  Bottom Layer w0.254: Debug4.4@2.002,43.277 6.041,47.316 13.75,47.316 22.386,55.952 v1(23.948,55.952) ; v1(35.492,85.009) 37.993,85.009 v1(40.457,82.545) 39.975,82.064 39.975,79.447 42.164,77.258 42.164,69.541 43.543,68.161 48.783,68.161 49.678,69.056 51.534,69.056 53.285,67.305 v1(57.336,67.305)
P133: Debug4.2 FPGA1.133 IC7.12 | length 172.4
  Top Layer w0.158: IC7.12@39.803,79.153 39.803,82.717
  Top Layer w0.189: 58.637,61.901 FPGA1.133@61.748,61.901
  Top Layer w0.254: v1(9.774,91.131) v1(34.438,91.131) ; v1(37.308,83.384) 37.943,82.749 39.772,82.749 39.803,82.717 ; v1(58.238,58.746) 58.238,61.502 58.637,61.901
  Bottom Layer w0.254: Debug4.2@2.002,38.197 0.91,39.289 0.91,41.524 ; v1(9.774,91.131) 0.91,82.266 0.91,41.524 ; v1(34.438,91.131) 34.438,83.727 34.781,83.384 v1(37.308,83.384) ; v1(58.238,58.746) 55.215,58.746 54.898,58.428 54.898,53.234 52.053,50.389 41.931,50.389 34.946,43.404 31.517,43.404 31.237,43.125 9.901,43.125 8.631,41.855 1.24,41.855 0.91,41.524
P134: Debug4.3 FPGA1.134 IC7.11 | length 128.8
  Top Layer w0.158: IC7.11@40.303,79.153 40.303,80.933
  Top Layer w0.189: v1@59.115,61.401 FPGA1.134@61.748,61.401
  Top Layer w0.254: 40.303,80.933 v1(40.62,81.25) ; v1(50.77,81.885) 51.405,81.885 56.46,76.83 56.46,70.787 55.164,69.492 55.164,61.616 v1(54.707,61.159) v1(54.707,48.459) ; v1(58.873,61.159) v1@59.115,61.401
  Bottom Layer w0.254: Debug4.3@2.002,40.737 3.094,39.645 3.094,37.689 2.154,36.749 0.935,36.749 0.91,36.724 0.91,34.59 0.935,34.565 10.13,34.565 12.314,36.749 24.595,36.749 25.218,37.372 25.218,41.499 25.599,41.88 27.199,41.88 29.561,39.518 33.854,39.518 42.794,48.459 v1(54.707,48.459) ; v1(40.62,81.25) 41.255,81.885 v1(50.77,81.885) ; v1(54.707,61.159) v1(58.873,61.159)
P135: FPGA1.135 IC7.81 | length 19.3
  Top Layer w0.158: IC7.81@46.828,68.128 49.185,68.128
  Top Layer w0.189: v1@59.783,60.901 FPGA1.135@61.748,60.901
  Top Layer w0.254: 49.185,68.128 v1(50.338,66.975) ; v1(59.568,60.686) v1@59.783,60.901
  Bottom Layer w0.254: v1(50.338,66.975) 50.338,65.629 50.685,65.282 55.677,65.282 59.568,61.391 v1(59.568,60.686)
P136: FPGA1.136
P137: FPGA1.137
P139: FPGA1.139
PIC_SRAM_/CS: IC4.1 IC7.78 | length 53.1
  Top Layer w0.158: IC7.78@46.828,66.628 49.397,66.628
  Top Layer w0.252: 20.32,44.212 IC4.1@20.32,44.737
  Top Layer w0.254: v1(20.015,43.907) 20.32,44.212 ; v1(46.096,64.461) 49.195,64.461 49.729,64.994 49.729,66.296 49.397,66.628
  Bottom Layer w0.254: v1(20.015,43.907) 20.368,43.555 30.5,43.555 30.767,43.822 34.376,43.822 42.213,51.659 47.049,51.659 47.366,51.977 47.366,58.263 46.096,59.533 v1(46.096,64.461)
PIC_SRAM_/WP: IC4.3 IC7.58 | length 31.2
  Top Layer w0.158: IC7.58@36.803,64.103 36.803,63.226 37.249,62.781 v1@37.249,59.69
  Top Layer w0.254: IC4.3@22.86,44.737 22.86,44.166 25.37,44.141 25.903,44.674 25.903,47.273 25.432,47.744 25.432,49.6 v1(25.903,50.072) ; v1(37.156,59.597) v1@37.249,59.69
  Bottom Layer w0.254: v1(25.903,50.072) 26.205,50.373 26.695,50.373 30.332,54.01 30.332,56.815 32.895,59.379 36.938,59.379 v1(37.156,59.597)
PIC_UART1_/CTS: IC7.47 Module4.16 | length 59.5
  Top Layer w0.158: 29.253,66.998 30.828,66.998 IC7.47@31.778,67.128
  Top Layer w0.254: 29.253,66.998 26.675,64.419 26.675,61.022 v1(31.085,56.612) ; v1(29.51,51.303) 29.51,31.014 32.38,28.143 v1(32.38,16.623)
  Bottom Layer w0.254: v1(29.51,51.303) 30.983,52.777 30.983,56.51 v1(31.085,56.612) ; Module4.16@30.499,16.623 v1(32.38,16.623)
PIC_UART1_/RTS: IC7.48 Module4.12 | length 53.9
  Top Layer w0.158: 29.542,66.628 IC7.48@31.778,66.628
  Top Layer w0.254: 29.542,66.628 27.083,64.169 27.083,61.224 27.885,60.422 v1(29.713,60.422) ; v1(32.736,60.422) 35.759,57.399 35.759,34.451 33.015,31.707 v1(33.015,29.282)
  Bottom Layer w0.254: v1(29.713,60.422) v1(32.736,60.422) ; Module4.12@30.499,24.623 33.015,27.139 v1(33.015,29.282)
PIC_UART1_RX: Debug3.2 IC7.52 Module4.2 | length 114.8
  Top Layer w0.158: 33.803,62.137 IC7.52@33.803,64.103
  Top Layer w0.254: v1(28.393,13.559) v1(28.393,36.292) ; 33.803,62.137 33.409,61.743 31.39,61.743 30.831,61.184 30.831,59.558 v1(34.514,55.875) ; v1(38.959,53.005) 38.959,48.713 43.836,43.836 v1(43.836,10.623)
  Bottom Layer w0.254: Debug3.2@26.488,38.197 v1(28.393,36.292) ; v1(28.393,13.559) 40.966,13.559 v1(43.836,10.623) Module4.2@52.499,10.623 ; v1(34.514,55.875) 38.832,55.875 39.238,55.469 39.238,53.285 v1(38.959,53.005)
PIC_UART1_TX: Debug3.3 IC7.53 Module4.3 | length 77
  Top Layer w0.158: 34.303,60.549 IC7.53@34.303,64.103
  Top Layer w0.254: 34.303,60.549 36.571,58.281 v1(36.571,36.749) ; v1(46.808,34.692) 46.808,21.204 v1(50.745,17.267)
  Bottom Layer w0.254: Debug3.3@26.488,40.737 30.475,36.749 v1(36.571,36.749) 44.75,36.749 v1(46.808,34.692) ; v1(50.745,17.267) 50.745,16.291 50.171,15.718 50.171,13.222 50.77,12.623 Module4.3@52.499,12.623
SOSCI: C34.2 IC7.73 X2.1 | length 8.9
  Top Layer w0.154: 44.303,59.356 IC7.73@44.303,64.103
  Top Layer w0.254: 44.303,59.356 43.872,58.925 C34.2@43.872,57.404 43.872,57.401 45.86,57.401 X2.1@45.877,57.418
SOSCO: C35.2 IC7.74 X2.2 | length 12.2
  Top Layer w0.158: IC7.74@44.803,64.103 44.803,62.884 46.808,60.879
  Top Layer w0.254: C35.2@43.872,54.61 45.069,54.61 X2.2@45.877,55.418 46.808,56.349 46.808,60.879
SYS: C36.1 C37.1 C38.2 C43.1 C49.2 D1.K D3.K R19.2 REG2.1 REG4.1 | length 131.4
  Top Layer w1.37: C38.2@21.857,110.806 21.857,109.228 22.098,108.987 R19.2@22.098,107.446
  Bottom Layer w0.75: 25.048,110.397 35.116,110.397 REG4.1@35.43,113.051 ; C49.2@34.039,116.459 34.039,116.454 34.039,113.572 34.56,113.051 REG4.1@35.43,113.051 ; 35.433,109.271 REG4.1@35.433,113.051 ; 42.515,113.787 60.112,113.787 ; C43.1@59.693,117.221 59.693,114.207 60.112,113.787 ; REG2.1@61.087,113.792 61.087,113.787 60.112,113.787 ; REG4.1@35.43,113.051 REG4.1@35.433,113.051 ; REG4.1@35.43,113.051 REG4.1@35.433,113.076 REG4.1@35.433,113.051
  Bottom Layer w0.787: 31.085,116.454 C49.2@34.039,116.454 ; C49.2@34.039,116.459 34.039,120.155
  Bottom Layer w1.37: D1.K@10.033,124.599 D3.K@16.256,124.599 22.229,124.599 C37.1@23.765,123.063 23.765,124.497 24.1,124.832 29.363,124.832 34.039,120.155 ; R19.2@22.098,107.446 25.048,110.397 ; C36.1@23.758,117.533 23.758,118.756 24.1,119.098 28.442,119.098 31.085,116.454 ; 35.433,109.271 33.701,107.539 33.701,98.332 34.044,97.989 41.664,97.989 42.007,98.332 42.007,113.279 42.515,113.787
SYSPOWMONITOR: D2.K IC7.23 R19.1 R20.2 | length 30.3
  Top Layer w0.158: 33.668,81.187 34.303,80.552 IC7.23@34.303,79.153
  Top Layer w0.254: R20.2@25.781,95.373 29.246,98.838 D2.K@29.591,98.838 ; v1(30.983,81.187) 33.668,81.187
  Bottom Layer w0.254: R19.1@22.098,95.246 23.871,95.246 23.998,95.373 R20.2@25.781,95.373 30.983,90.171 v1(30.983,81.187)
TCK: BB.1 FPGA1.12 R30.4 | length 227.2
  Top Layer w0.189: 69.048,49.956 FPGA1.12@69.048,54.601
  Top Layer w0.254: 69.048,49.956 v1(72.148,46.856) ; v1(70.404,36.241) 70.43,39.137 v1(71.242,39.137) ; v1(87.803,24.633) 87.803,14.194 88.133,13.864 100.402,13.864 107.895,6.371 107.895,0.821 108.238,0.478 116.988,0.478 122.957,6.447 122.957,30.602 125.878,33.523 v1(125.878,124.122)
  Bottom Layer w0.254: v1(70.404,36.241) 71.814,34.832 77.605,34.832 v1(87.803,24.633) ; v1(71.242,39.137) 71.242,41.666 70.785,42.123 R30.4@70.386,42.123 70.386,45.093 v1(72.148,46.856) ; BB.1@118.575,124.122 v1(125.878,124.122)
TDI: BB.9 FPGA1.13 R27.4 | length 126.7
  Top Layer w0.189: 69.548,52.363 FPGA1.13@69.548,54.601
  Top Layer w0.254: R27.4@67.836,42.123 v1(67.836,48.751) ; v1(70.412,51.499) 69.548,52.363 70.348,51.444 v1(71.446,50.183) ; v1(91.105,60.397) 90.848,60.654 90.848,63.441 91.105,63.699 91.105,106.587 91.601,107.082 94.973,107.082 95.779,107.887 95.779,114.207 95.334,114.651 93.078,114.651 93.052,114.676 93.052,118.249 v1(93.696,118.893)
  Bottom Layer w0.254: v1(67.836,48.751) 69.268,50.183 v1(71.446,50.183) ; v1(70.412,51.499) 70.742,51.829 76.678,51.829 78.209,53.361 79.028,53.361 80.134,52.254 81.362,52.254 83.307,54.199 86.125,54.199 87.065,55.139 87.065,58.517 87.092,58.544 88.91,58.544 90.762,60.397 v1(91.105,60.397) ; v1(93.696,118.893) 94.534,119.731 104.025,119.731 BB.9@108.415,124.122
TDO: BB.3 FPGA1.10 | length 110.1
  Top Layer w0.189: v1(67.915,53.183) 68.048,53.316 FPGA1.10@68.048,54.601
  Top Layer w0.254: v1(91.88,62.708) 91.929,62.757 91.929,68.404 92.091,68.566 92.091,103.417 104.212,115.537 104.212,124.822 105.404,126.015 v1(114.142,126.015)
  Bottom Layer w0.254: v1(67.915,53.183) 68.612,53.183 70.658,55.229 73.034,55.229 73.706,55.901 82.063,55.901 83.712,57.55 83.712,58.253 85.778,60.319 86.875,60.319 89.264,62.708 v1(91.88,62.708) ; v1(114.142,126.015) BB.3@116.035,124.122
TMS: BB.5 FPGA1.11 R27.3 | length 136.8
  Top Layer w0.189: 68.548,45.736 FPGA1.11@68.548,54.601
  Top Layer w0.254: 68.548,45.736 70.247,44.037 80.306,44.037 ; R27.3@68.711,42.123 68.711,43.404 68.942,43.636 79.904,43.636 80.306,44.037 ; v1(86.446,51.47) 81.949,46.973 81.949,45.681 80.306,44.037 ; v1(94.585,55.571) 94.85,55.836 94.85,65.196 94.533,65.513 94.533,87.491 94.995,87.953 94.995,102.785 105.482,113.272 v1(105.482,123.986)
  Bottom Layer w0.254: v1(86.446,51.47) 88.397,51.47 89.874,52.947 90.726,52.947 93.349,55.571 v1(94.585,55.571) ; v1(105.482,123.986) 107.103,125.607 112.01,125.607 BB.5@113.495,124.122
USB_PIC_N: IC7.56 Module6.4 | length 68.6
  Top Layer w0.158: IC7.56@35.803,64.103 35.803,63.075 35.962,62.916 35.962,60.955
  Top Layer w0.254: Module6.4@8.589,74.185 10.253,74.185 v1(10.257,74.189) ; v1(34.92,60.828) 35.835,60.828 35.962,60.955
  Bottom Layer w0.254: v1(10.257,74.189) 1.773,65.705 1.773,54.059 2.193,53.64 12.365,53.64 16.882,58.157 20.082,58.157 25.092,63.167 33.788,63.167 34.184,62.772 34.184,61.565 v1(34.92,60.828)
USB_PIC_P: IC7.57 Module6.3 | length 39.9
  Top Layer w0.158: IC7.57@36.303,64.103 36.303,62.9 v1(36.673,62.53)
  Top Layer w0.254: Module6.3@8.589,73.385 12.128,73.385 v1(12.34,73.173)
  Bottom Layer w0.254: v1(12.34,73.173) 13.037,73.87 33.882,73.87 34.096,73.655 34.096,66.264 36.546,63.814 36.546,62.657 v1(36.673,62.53)
USD_/CS: IC7.77 Module3.2 | length 79
  Top Layer w0.158: IC7.77@46.828,66.128 v1@48.671,66.128
  Top Layer w0.254: Module3.2@10.239,88.769 35.951,88.769 v1(36.788,89.607) ; v1(48.255,69.21) 49.475,69.21 v1(50.262,68.423) ; v1@48.671,66.128 v1(48.865,65.934)
  Bottom Layer w0.254: v1(36.788,89.607) 44.928,89.607 51.659,82.876 51.659,81.885 50.973,81.199 43.302,81.199 42.972,80.869 42.972,77.618 42.998,77.592 45.055,77.592 45.538,77.11 45.538,74.023 45.272,73.757 45.272,69.506 45.568,69.21 v1(48.255,69.21) ; v1(48.865,65.934) 48.865,67.026 v1(50.262,68.423)